# EAGLE board OpenBook_board (EAGLE 9.7.0)
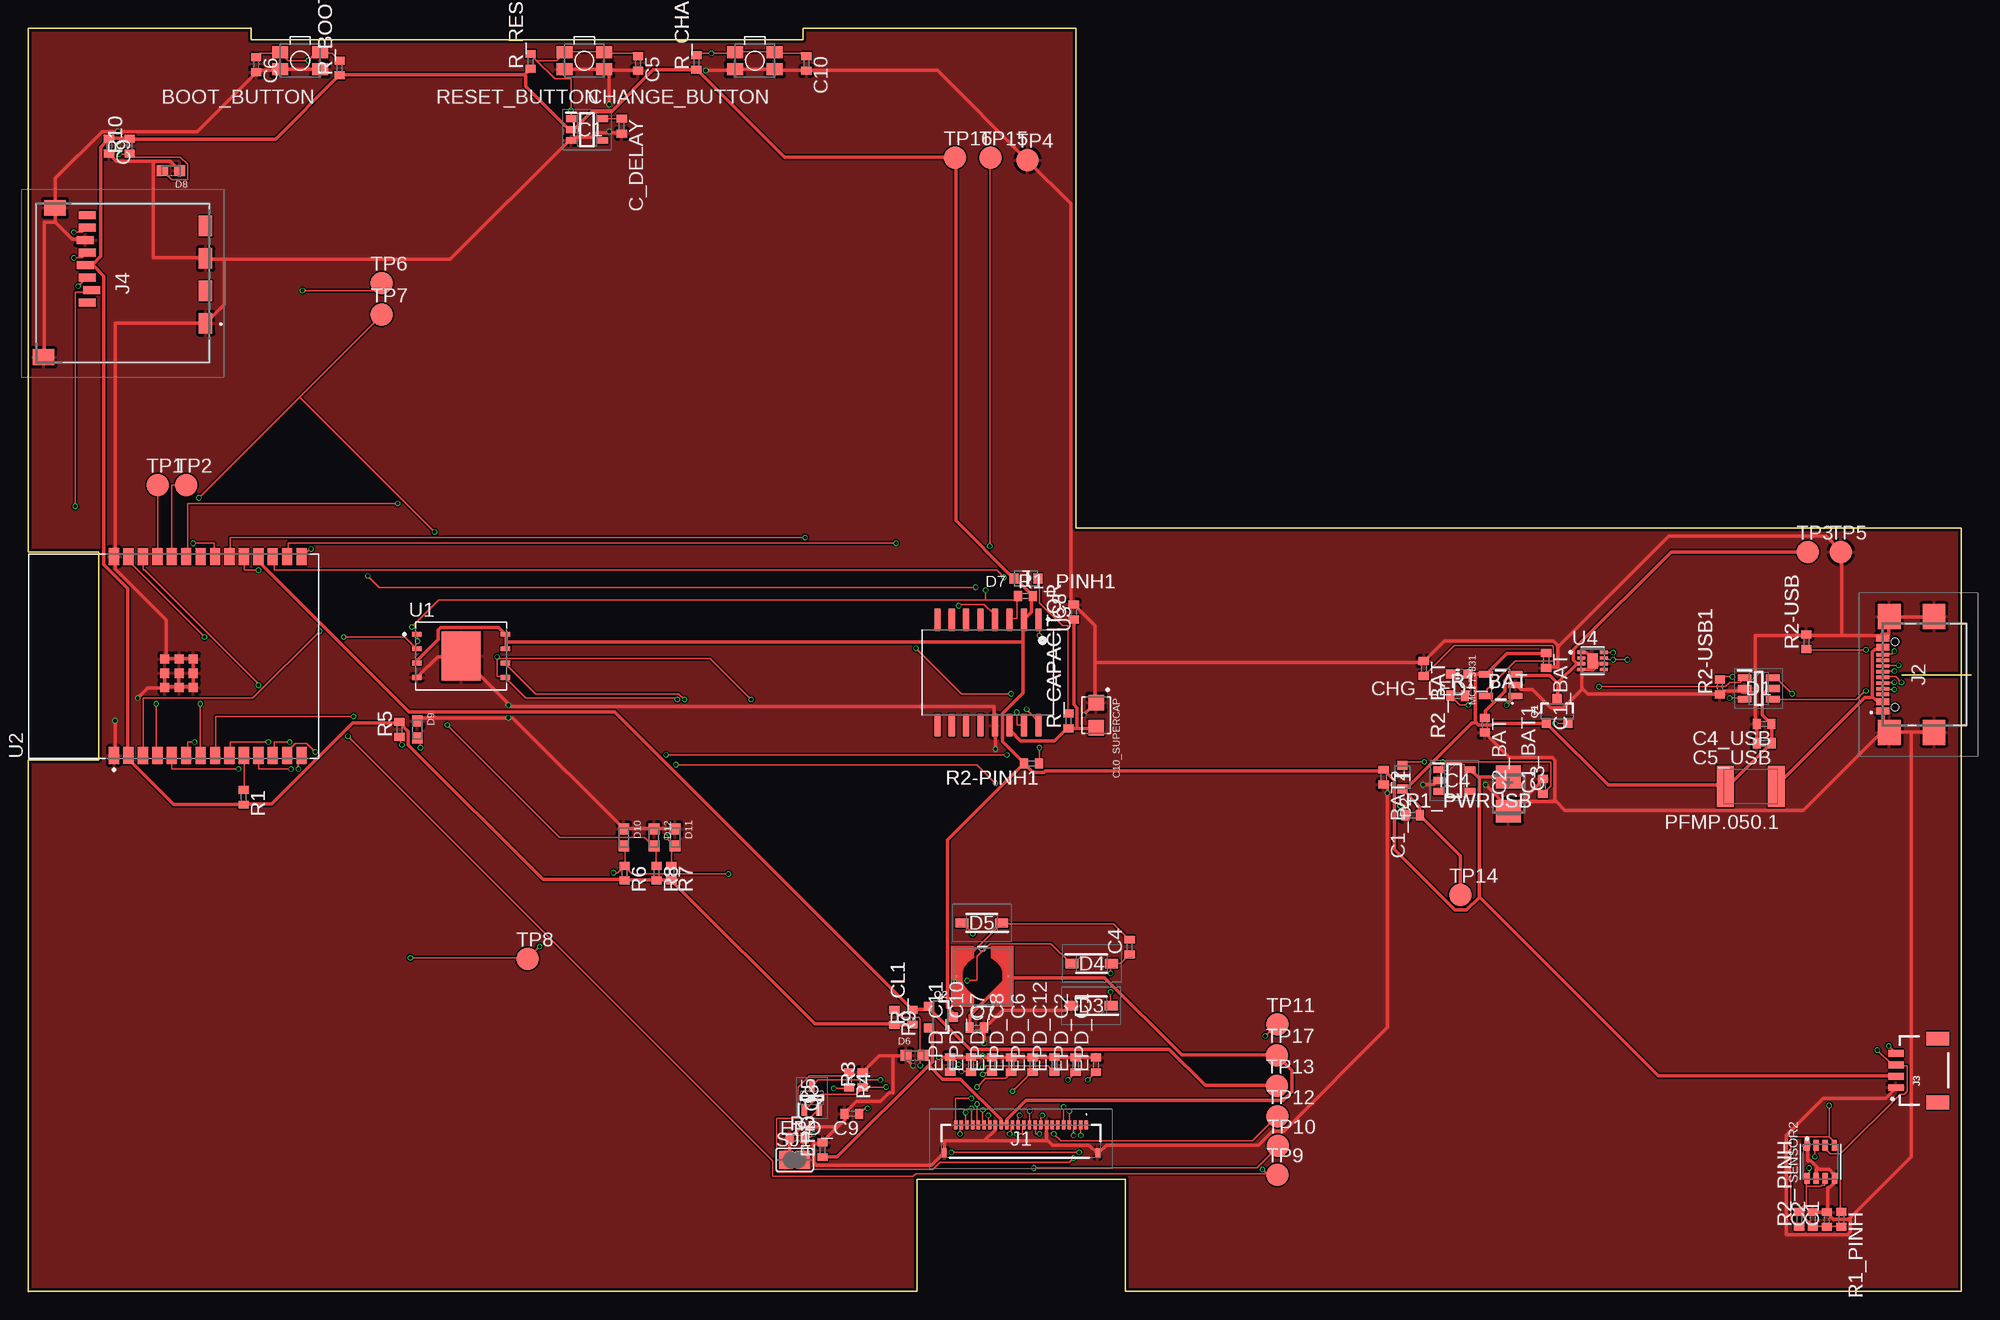
[diagram p0: board, top side]
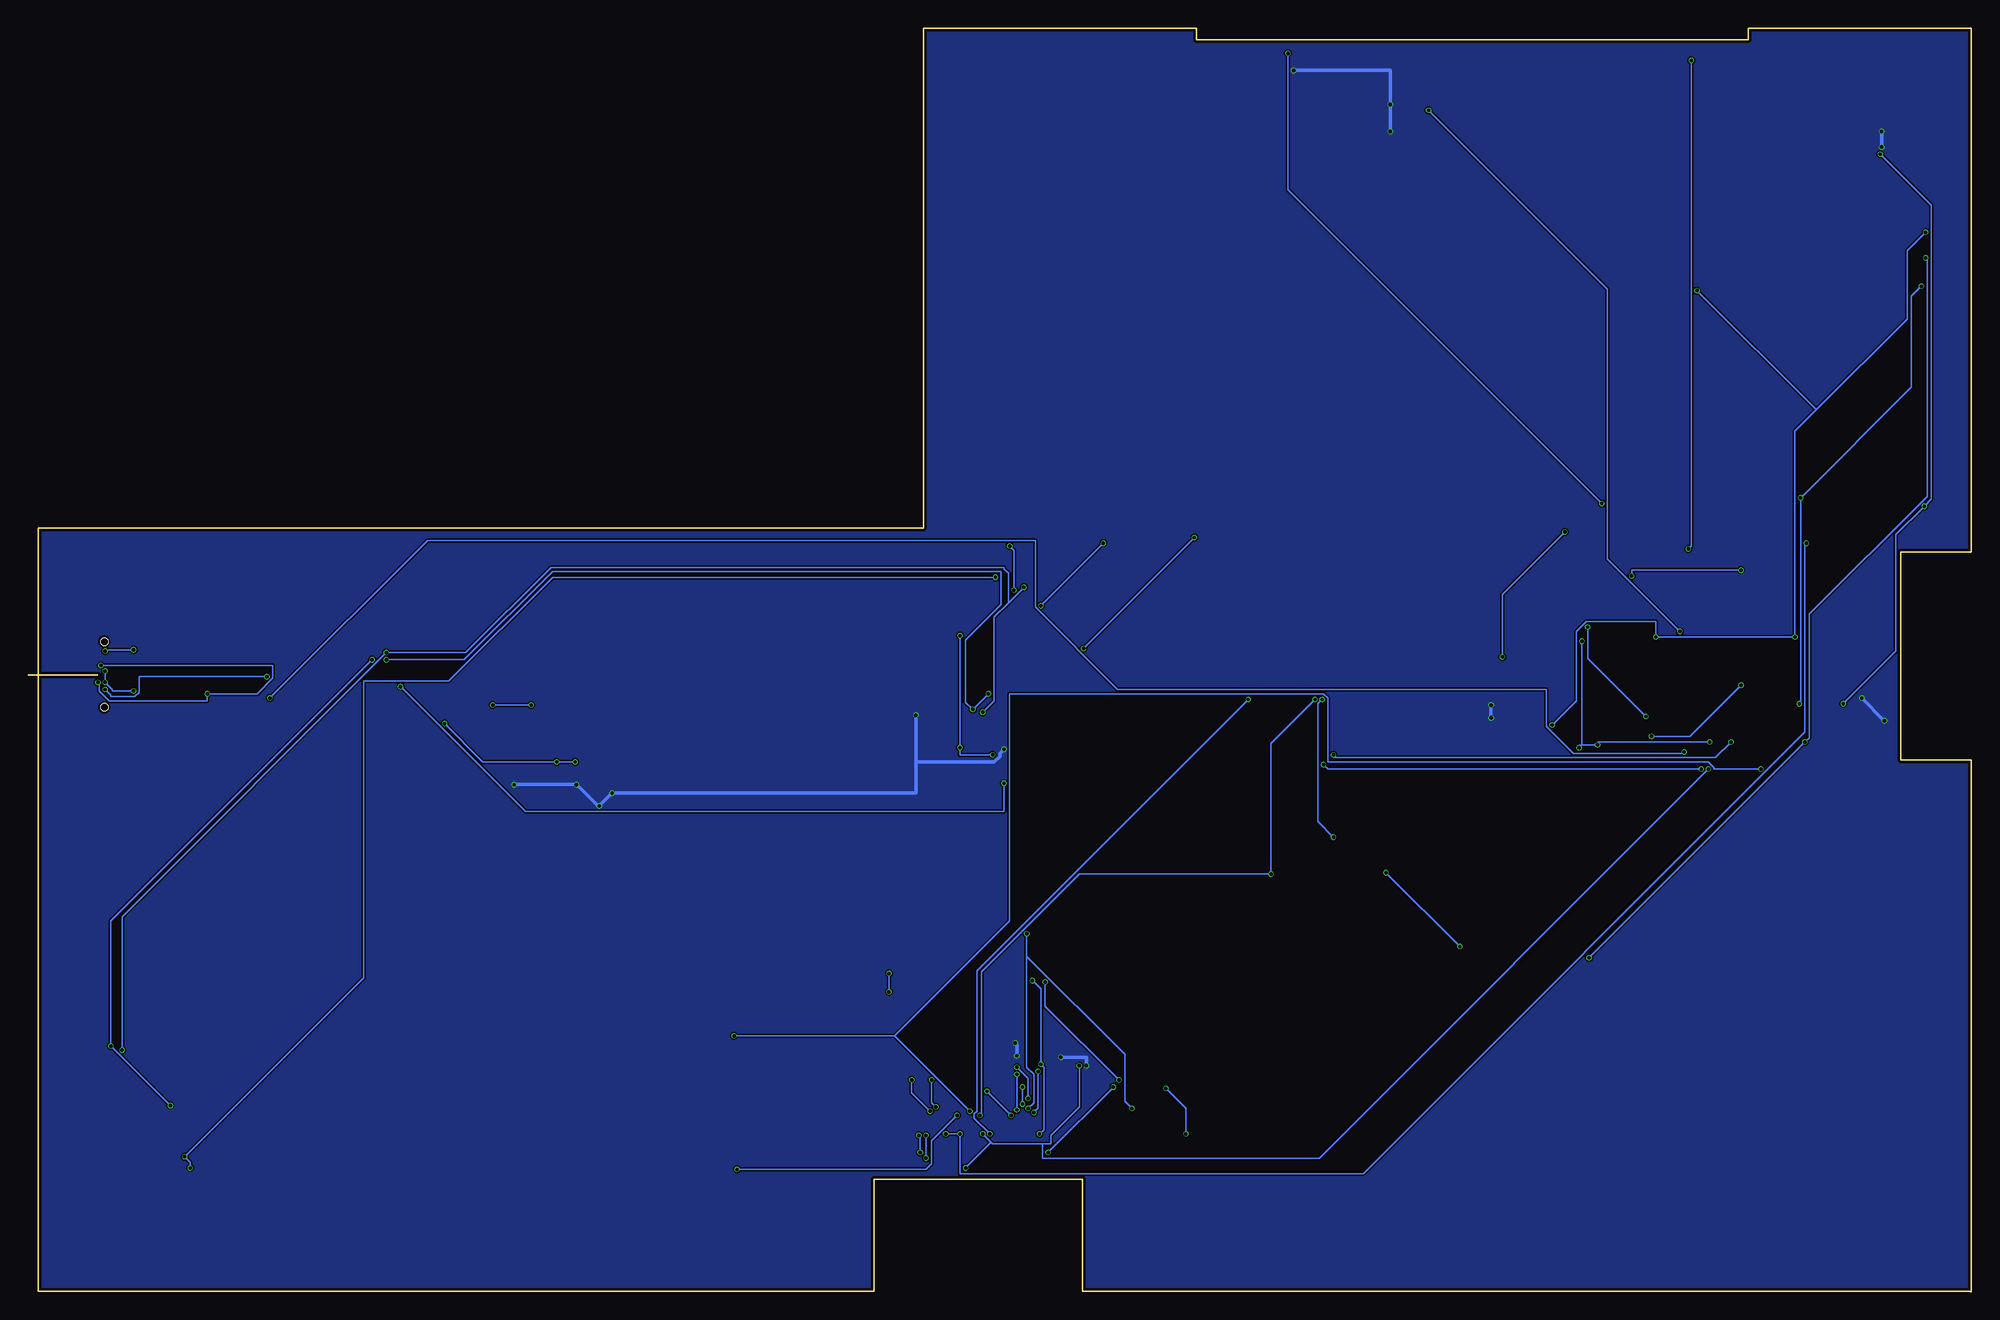
[diagram p1: board, bottom side, seen from below]

Size 171 x 111.2 mm. Coordinates in mm from the lower left corner, seen from the top.
Outline: 171,54.3 164.9,54.3
Outline: 0,0 0,46.8 6.2,46.8 6.2,65.1 0,65.1 0,111.2 19.6,111.2 19.6,110.2 68.2,110.2 68.2,111.2 92.2,111.2 92.2,67.2 170.15,67.2 170.15,0.08 170.12,0.04 96.57,0.04 96.57,9.9 78.2,9.9 78.2,0.04 0.04,0.04 0,0
Copper layers (1*16): Top 0.035mm / dielectric 1.6mm / Bottom 0.035mm
Design rules "jlcpcb-2layers *": minimum track width 5mil, minimum drill 0.3mm, track to track 5mil, track to pad 5mil, pad to pad 5mil, via to via 5mil, smd to smd 5mil, copper to edge 0.2mm, drill to drill 6mil, minimum pad ring 10mil, minimum via ring 3mil, stop-mask expansion 4mil, vias tented up to drill 0mil, thermal gap 10mil
Net classes: 0 default: width 0.15 mm; 1 Trasee Alimentare: width 0.3 mm

## Footprints (pad centres in the part's own frame; a part is rotated, then mirrored left to right if it is on the bottom)
MYBUTTON = smd 1.4 x 1.05: 1 1.75,0.75; 2 -1.75,0.75; 3 -1.75,-0.75; 4 1.75,-0.75
EAGLE-LTSPICE_C0402 = smd 0.7 x 0.9: 1 -0.65,0; 2 0.65,0
RCL_CT3528 = smd 2 x 2.2: + -1.5,0; - 1.5,0
CAPCP3225X100N = smd 1.4 x 1.4: 1 -1.1,0; 2 1.1,0
ADAFRUIT_CHIP-LED0603 = smd 0.8 x 0.8: A 0,-0.75; C 0,0.75
SOT95P280X145-6N = smd 1.2 x 0.6: 1 -1.25,0.95; 2 -1.25,0; 3 -1.25,-0.95; 4 1.25,-0.95; 5 1.25,0; 6 1.25,0.95
ESP32_WROVER_AVX---SD0805S020S1R0_AVX_SD0805S020S1R0_0 = smd 0.8 x 0.9: 1 -1.05,0; 2 1.05,0
SOD3716X135N = smd 1.15 x 0.8: 1 -1.75,0; 2 1.75,0
DIOC1608X36N = smd 0.97 x 0.94: 1 -0.75,0; 2 0.75,0
SOT95P280X125-5N = smd 0.9 x 0.6: 1 -1.4,0.95; 2 -1.4,0; 3 -1.4,-0.95; 4 1.4,-0.95; 5 1.4,0.95
SOT95P280X120-5N = smd 0.9 x 0.6: 1 -1.4,0.95; 2 -1.4,0; 3 -1.4,-0.95; 4 1.4,-0.95; 5 1.4,0.95
FH34SRJ24S05SH99 = smd 0.3 x 0.8: 1 5.75,1.45; 2 5.25,1.45; 3 4.75,1.45; 4 4.25,1.45; 5 3.75,1.45; 6 3.25,1.45; 7 2.75,1.45; 8 2.25,1.45; 9 1.75,1.45; 10 1.25,1.45; 11 0.75,1.45; 12 0.25,1.45; 13 -0.25,1.45; 14 -0.75,1.45; 15 -1.25,1.45; 16 -1.75,1.45; 17 -2.25,1.45; 18 -2.75,1.45; 19 -3.25,1.45; 20 -3.75,1.45; 21 -4.25,1.45; 22 -4.75,1.45; 23 -5.25,1.45; 24 -5.75,1.45 | smd 0.4 x 0.8: MP1 6.75,-1.05; MP2 -6.75,-1.05
SAMACSYS_PARTS_USB4110GFA = smd 0.3 x 1.15: A1 -3.35,3.678; A4 -2.55,3.678; A5 -1.25,3.678; A6 -0.25,3.678; A7 0.25,3.678; A8 1.25,3.678; A9 2.55,3.678; A12 3.35,3.678; B1 3.05,3.678; B4 2.25,3.678; B5 1.75,3.678; B6 0.75,3.678; B7 -0.75,3.678; B8 -1.75,3.678; B9 -2.25,3.678; B12 -3.05,3.678 | smd 2.18 x 2: MP1 -5.11,-0.827; MP2 5.11,-0.827; MP3 -5.11,3.103; MP4 5.11,3.103 | hole 0.65: -2.89,2.603; 2.89,2.603
JST04_1MM_RA = smd 0.6 x 1.35: 1 -1.5,0; 2 -0.5,0; 3 0.5,0; 4 1.5,0 | smd 1.2 x 2: NC1 2.8,-3.675; NC2 -2.8,-3.675
112ATAARR03ATTEND = smd 1.8 x 1.2: G1 10.6,10.4; G2 4.9,10.4; S1 7.75,10.4; S2 2.05,10.4 | smd 1.4 x 1.9: G3 13.6,-3.85; G4 0.45,-2.85 | smd 0.7 x 1.5: P1 8.8,0; P2 7.7,0.4; P3 6.6,0; P4 5.5,-0.2; P5 4.4,0; P6 3.3,-0.2; P7 2.2,0; P8 1.1,0
IND_4828-WE-TPC_WRE = smd 0.127 x 0.127: 1 -2.286,0; 2 2.286,0
ESP32_WROVER_SPARKFUN-IC-POWER_SOT23-5 = smd 0.55 x 1.2: 1 -0.95,-1.3; 2 0,-1.3; 3 0.95,-1.3; 4 0.95,1.3; 5 -0.95,1.3
ESP32C6_VARISTOR_CT/CN1812 = smd 1.5 x 3.6: 1 -2.25,0; 2 2.25,0
ESP32_WROVER_SPARKFUN-DISCRETESEMI_SOT23-3 = smd 0.8 x 0.9: 1 -0.95,-1; 2 0.95,-1; 3 0,1.1
SOT65P210X110-3N = smd 1.05 x 0.5: 1 -1.05,0.65; 2 -1.05,-0.65; 3 1.05,0
ESP32_WROVER_EAGLE-LTSPICE_R0402 = smd 0.7 x 0.9: 1 -0.65,0; 2 0.65,0
ESP32_WROVER_BME680_PSON80P300X300X100-8N = smd 1.016 x 0.5: 1 1.458,1.2; 2 1.458,0.4; 3 1.458,-0.4; 4 1.458,-1.2; 5 -1.458,-1.22; 6 -1.458,-0.4; 7 -1.458,0.4; 8 -1.458,1.2
SJ = smd 1.168 x 1.6: 1 -0.762,0; 2 0.762,0
TP20R = smd 2 x 2: TP 0,0
SON127P600X800X80-9N = smd 0.94 x 0.44: 1 -3.895,1.905; 2 -3.895,0.635; 3 -3.895,-0.635; 4 -3.895,-1.905; 5 3.895,-1.905; 6 3.895,-0.635; 7 3.895,0.635; 8 3.895,1.905 | smd 3.4 x 4.3: 9 0,0
XCVR_ESP32-C6-WROOM-1-N8 = smd 1.5 x 0.9: 1 -8.75,5.26; 2 -8.75,3.99; 3 -8.75,2.72; 4 -8.75,1.45; 5 -8.75,0.18; 6 -8.75,-1.09; 7 -8.75,-2.36; 8 -8.75,-3.63; 9 -8.75,-4.9; 10 -8.75,-6.17; 11 -8.75,-7.44; 12 -8.75,-8.71; 13 -8.75,-9.98; 14 -8.75,-11.25; 15 8.75,-11.25; 16 8.75,-9.98; 17 8.75,-8.71; 18 8.75,-7.44; 19 8.75,-6.17; 20 8.75,-4.9; 21 8.75,-3.63; 22 8.75,-2.36; 23 8.75,-1.09; 24 8.75,0.18; 25 8.75,1.45; 26 8.75,2.72; 27 8.75,3.99; 28 8.75,5.26 | smd 0.8 x 0.8: 29_1 -2.755,0.79; 29_2 -1.505,0.79; 29_3 -0.255,0.79; 29_4 -2.755,-0.46; 29_5 -1.505,-0.46; 29_6 -0.255,-0.46; 29_7 -2.755,-1.71; 29_8 -1.505,-1.71; 29_9 -0.255,-1.71
SOIC127P1032X265-16N = smd 2.05 x 0.59: 1 -4.655,4.445; 2 -4.655,3.175; 3 -4.655,1.905; 4 -4.655,0.635; 5 -4.655,-0.635; 6 -4.655,-1.905; 7 -4.655,-3.175; 8 -4.655,-4.445; 9 4.655,-4.445; 10 4.655,-3.175; 11 4.655,-1.905; 12 4.655,-0.635; 13 4.655,0.635; 14 4.655,1.905; 15 4.655,3.175; 16 4.655,4.445
SON50P200X200X80-9N = smd 0.76 x 0.27: 1 -0.985,0.75; 2 -0.985,0.25; 3 -0.985,-0.25; 4 -0.985,-0.75; 5 0.985,-0.75; 6 0.985,-0.25; 7 0.985,0.25; 8 0.985,0.75 | smd 0.9 x 1.3: 9 0,0

## Placement (x,y rotation side)
BOOT_BUTTON  BUTTON_CUSYOMV1  [MYBUTTON]  23.92,108.35 180 top
C1  100nF  [EAGLE-LTSPICE_C0402]  158.29,6.35 90 top
C1_BAT  4.7uF  [EAGLE-LTSPICE_C0402]  133.59,55.55 270 top
C1_BAT1  4.7uF  [EAGLE-LTSPICE_C0402]  133.31,44.47 90 top
C1_BAT2  4.7uF  [EAGLE-LTSPICE_C0402]  119.29,45.29 270 top
C2  100nF  [EAGLE-LTSPICE_C0402]  157.07,6.35 90 top
C2_BAT  4.7uF  [EAGLE-LTSPICE_C0402]  128.2,49.85 270 top
C3  100uF  [RCL_CT3528]  130.29,43.8 270 top
C4  4.7uF  [EAGLE-LTSPICE_C0402]  96.93,30.33 90 top
C4_USB  100nF  [EAGLE-LTSPICE_C0402]  152.78,49.97 180 top
C5  1uF  [EAGLE-LTSPICE_C0402]  53.66,108.11 270 top
C5_USB  4.7uF  [EAGLE-LTSPICE_C0402]  152.79,48.27 180 top
C6  100nF  [EAGLE-LTSPICE_C0402]  20.05,108.01 270 top
C7  10uF  [EAGLE-LTSPICE_C0402]  83.48,23.23 0 top
C8  100nF  [EAGLE-LTSPICE_C0402]  92.02,59.83 90 top
C9  100nF  [EAGLE-LTSPICE_C0402]  7.1,100.83 270 top
C10  100nF  [EAGLE-LTSPICE_C0402]  68.48,108.11 270 top
C10_SUPERCAP  CPH3225A  [CAPCP3225X100N]  93.99,50.74 270 top
C_DELAY  100nF  [EAGLE-LTSPICE_C0402]  52.23,102.59 270 top
CHANGE_BUTTON  BUTTON_CUSYOMV1  [MYBUTTON]  63.94,108.35 180 top
CHG_LED  [ADAFRUIT_CHIP-LED0603]  125.94,54.35 90 top
D1  USBLC6-2SC6Y  [SOT95P280X145-6N]  152.3,53.09 0 top
D2  ESP32_WROVER_AVX---SD0805S020S1R0_AVX_SD0805S020S1R0_0_0AVX_SD0805S020S1R0_0_0  [ESP32_WROVER_AVX---SD0805S020S1R0_AVX_SD0805S020S1R0_0]  120.95,45.28 270 top
D3  MBR0530  [SOD3716X135N]  93.56,25.17 180 top
D4  MBR0530  [SOD3716X135N]  93.6,28.87 0 top
D5  MBR0530  [SOD3716X135N]  83.92,32.45 180 top
D6  PGB1010603MR  [DIOC1608X36N]  78,20.79 0 top
D7  ESP32_WROVER_AVX---SD0805S020S1R0_AVX_SD0805S020S1R0_0_0AVX_SD0805S020S1R0_0_0  [ESP32_WROVER_AVX---SD0805S020S1R0_AVX_SD0805S020S1R0_0]  87.8,62.78 180 top
D8  PGB1010603MR  [DIOC1608X36N]  12.55,98.67 180 top
D9  PGB1010603MR  [DIOC1608X36N]  34.23,49.47 270 top
D10  PGB1010603MR  [DIOC1608X36N]  52.41,39.97 270 top
D11  PGB1010603MR  [DIOC1608X36N]  56.93,39.97 270 top
D12  PGB1010603MR  [DIOC1608X36N]  55.07,39.97 270 top
EPD_C1  1uF/50V  [EAGLE-LTSPICE_C0402]  93.98,19.97 90 top
EPD_C2  1uF/50V  [EAGLE-LTSPICE_C0402]  92.19,19.97 90 top
EPD_C5  0.1uF/50V  [EAGLE-LTSPICE_C0402]  69.91,12.49 90 top
EPD_C6  1uF/50V  [EAGLE-LTSPICE_C0402]  88.4,19.97 90 top
EPD_C7  1uF/50V  [EAGLE-LTSPICE_C0402]  84.81,19.97 90 top
EPD_C8  1uF/50V  [EAGLE-LTSPICE_C0402]  86.52,19.97 90 top
EPD_C9  1uF/50V  [EAGLE-LTSPICE_C0402]  72.48,15.65 180 top
EPD_C10  1uF/50V  [EAGLE-LTSPICE_C0402]  82.97,19.99 90 top
EPD_C11  1uF/50V  [EAGLE-LTSPICE_C0402]  81.15,19.99 90 top
EPD_C12  1uF/50V  [EAGLE-LTSPICE_C0402]  90.31,19.99 90 top
IC1  BD5229G-TR  [SOT95P280X125-5N]  49.17,102.29 0 top
IC4  XC6220A331MR-G  [SOT95P280X120-5N]  125.51,44.99 0 top
J1  FH34SRJ-24S-0.5SH_99_  [FH34SRJ24S05SH99]  87.37,13.24 0 top
J2  SAMACSYS_PARTS_USB4110-GF-A  [SAMACSYS_PARTS_USB4110GFA]  166.91,54.32 90 top
J3  QWIIC_RIGHT_ANGLE  [JST04_1MM_RA]  164.39,19.46 90 top
J4  112A-TAAR-R03_ATTEND  [112ATAARR03ATTEND]  5.19,95.85 270 top
L1  68uH  [IND_4828-WE-TPC_WRE]  83.97,27.75 0 top
MCP73831  ESP32_WROVER_SPARKFUN-IC-POWER_MCP73831  [ESP32_WROVER_SPARKFUN-IC-POWER_SOT23-5]  129.59,53.39 90 top
PFMP.050.1  ESP32C6_VARISTORCN1812  [ESP32C6_VARISTOR_CT/CN1812]  151.6,44.46 180 top
Q1  20V/4.2A/52mΩ/1.4W  [ESP32_WROVER_SPARKFUN-DISCRETESEMI_SOT23-3]  134.56,51.06 0 top
Q2  20V/4.2A/52mΩ/1.4W  [ESP32_WROVER_SPARKFUN-DISCRETESEMI_SOT23-3]  80.28,24.16 270 top
Q3  SI1308EDL-T1-GE3  [SOT65P210X110-3N]  68.95,17.05 90 top
R1  10K  [ESP32_WROVER_EAGLE-LTSPICE_R0402]  18.95,43.51 270 top
R1_BAT  200  [ESP32_WROVER_EAGLE-LTSPICE_R0402]  125.81,52.45 0 top
R1_PINH  10K  [ESP32_WROVER_EAGLE-LTSPICE_R0402]  159.58,6.37 270 top
R1_PINH1  10K  [ESP32_WROVER_EAGLE-LTSPICE_R0402]  87.76,61.24 0 top
R1_PWRUSB  100K  [ESP32_WROVER_EAGLE-LTSPICE_R0402]  121.85,41.94 0 top
R2  2.2  [ESP32_WROVER_EAGLE-LTSPICE_R0402]  67.66,13.51 0 top
R2-PINH1  10K  [ESP32_WROVER_EAGLE-LTSPICE_R0402]  88.29,46.49 180 top
R2-USB  5k1  [ESP32_WROVER_EAGLE-LTSPICE_R0402]  156.49,57.21 90 top
R2-USB1  5K1  [ESP32_WROVER_EAGLE-LTSPICE_R0402]  148.88,53.23 90 top
R2_BAT  2K  [ESP32_WROVER_EAGLE-LTSPICE_R0402]  122.82,54.85 270 top
R2_PINH  10K  [ESP32_WROVER_EAGLE-LTSPICE_R0402]  155.86,6.37 90 top
R3  10K  [ESP32_WROVER_EAGLE-LTSPICE_R0402]  73.44,18.63 90 top
R4  0.47  [ESP32_WROVER_EAGLE-LTSPICE_R0402]  72.24,18.63 270 top
R5  10K  [ESP32_WROVER_EAGLE-LTSPICE_R0402]  32.66,49.48 90 top
R6  10K  [ESP32_WROVER_EAGLE-LTSPICE_R0402]  52.48,36.83 270 top
R7  10K  [ESP32_WROVER_EAGLE-LTSPICE_R0402]  56.6,36.83 270 top
R8  10K  [ESP32_WROVER_EAGLE-LTSPICE_R0402]  55.3,36.83 270 top
R9  10K  [ESP32_WROVER_EAGLE-LTSPICE_R0402]  76.21,24.13 270 top
R10  10K  [ESP32_WROVER_EAGLE-LTSPICE_R0402]  8.92,100.83 90 top
R_BOOT  10k  [ESP32_WROVER_EAGLE-LTSPICE_R0402]  27.4,107.72 90 top
R_CAPACITOR  15  [ESP32_WROVER_EAGLE-LTSPICE_R0402]  91.55,50.24 90 top
R_CHANGE  10k  [ESP32_WROVER_EAGLE-LTSPICE_R0402]  58.8,108.2 90 top
R_CL1  10K  [ESP32_WROVER_EAGLE-LTSPICE_R0402]  77.81,24.15 90 top
R_RESET  10k  [ESP32_WROVER_EAGLE-LTSPICE_R0402]  44.2,108.3 90 top
RESET_BUTTON  BUTTON_CUSYOMV1  [MYBUTTON]  48.93,108.35 180 top
SENSOR2  ESP32_WROVER_BME680_BME680  [ESP32_WROVER_BME680_PSON80P300X300X100-8N]  157.75,11.42 90 top
SJ1  [SJ]  67.44,11.59 0 top
TP1  TPTP20R  [TP20R]  11.37,71.01 0 top
TP2  TPTP20R  [TP20R]  13.89,71.01 0 top
TP3  TPTP20R  [TP20R]  156.61,65.11 0 top
TP4  TPTP20R  [TP20R]  87.93,99.61 0 top
TP5  TPTP20R  [TP20R]  159.55,65.11 0 top
TP6  TPTP20R  [TP20R]  31.09,88.79 0 top
TP7  TPTP20R  [TP20R]  31.11,85.99 0 top
TP8  TPTP20R  [TP20R]  43.93,29.29 0 top
TP9  TPTP20R  [TP20R]  109.95,10.29 0 top
TP10  TPTP20R  [TP20R]  110,12.81 0 top
TP11  TPTP20R  [TP20R]  109.95,23.51 0 top
TP12  TPTP20R  [TP20R]  109.95,15.41 0 top
TP13  TPTP20R  [TP20R]  109.9,18.11 0 top
TP14  TPTP20R  [TP20R]  126.05,34.91 0 top
TP15  TPTP20R  [TP20R]  84.7,99.81 0 top
TP16  TPTP20R  [TP20R]  81.55,99.81 0 top
TP17  TPTP20R  [TP20R]  109.9,20.81 0 top
U1  W25Q512JVEIQ  [SON127P600X800X80-9N]  38.09,55.96 0 top
U2  ESP32-C6-WROOM-1-N8  [XCVR_ESP32-C6-WROOM-1-N8]  12.8,55.94 90 top
U3  DS3231SN#  [SOIC127P1032X265-16N]  84.45,54.5 270 top
U4  MAX17048G+T10  [SON50P200X200X80-9N]  137.68,55.52 0 top

## Library data of the parts
BOOT_BUTTON C1 C1_BAT C1_BAT1 C1_BAT2 C2 C2_BAT C4 C4_USB C5 C5_USB C6-C10 C_DELAY CHANGE_BUTTON CHG_LED D3-D6 D8-D12 EPD_C1 EPD_C2 EPD_C5-EPD_C12 PFMP.050.1 R1 R1_BAT R1_PINH R1_PINH1 R1_PWRUSB R2 R2-PINH1 R2-USB R2-USB1 R2_BAT R2_PINH R3-R10 R_BOOT R_CAPACITOR R_CHANGE R_CL1 R_RESET RESET_BUTTON SJ1 TP1-TP17 = DeskAssistant v19 v1
C3 = DeskAssistant v19 v1; SPICEPREFIX: C
C10_SUPERCAP = DeskAssistant v19 v1; AVAILABILITY: Not in stock; CHECK_PRICES: https://www.snapeda.com/parts/CPH3225A/Seiko+Instruments/view-part/?ref=eda; DESCRIPTION: 11 mF (EDLC) Supercapacitor 3.3 V 1210 (3225 Metric) - -; MF: Seiko Instruments; MP: CPH3225A; PACKAGE: 1210 Seiko; PRICE: None; PURCHASE-URL: https://www.snapeda.com/api/url_track_click_mouser/?unipart_id=562593&manufacturer=Seiko Instruments&part_name=CPH3225A&search_term=None; SNAPEDA_LINK: https://www.snapeda.com/parts/CPH3225A/Seiko+Instruments/view-part/?ref=snap
D1 = DeskAssistant v19 v1; AVAILABILITY: In Stock; CHECK_PRICES: https://www.snapeda.com/parts/USBLC6-2SC6Y/STMicroelectronics/view-part/?ref=eda; DESCRIPTION: 17V Clamp 5A (8/20µs) Ipp Tvs Diode Surface Mount SOT-23-6; MF: STMicroelectronics; MP: USBLC6-2SC6Y; PACKAGE: SOT-23-6 STMicroelectronics; PRICE: None; SNAPEDA_LINK: https://www.snapeda.com/parts/USBLC6-2SC6Y/STMicroelectronics/view-part/?ref=snap
D2 D7 = DeskAssistant v19 v1; CENTROID_NOT_SPECIFIED: No; DATASHEET: http://datasheets.avx.com/schottky.pdf; DIGIKEY_DESCRIPTION: DIODE SCHOTTKY 20V 1A 0805; DIGIKEY_PART_NUMBER: 478-7800-1-ND; LEAD_FREE: yes; MF: AVX; MOUSER_PART_NUMBER: 581-SD0805S020S1R0; PACKAGE: 0805 (2012 metric); PREFIX: D; ROHS: yes; TEMPERATURE_RANGE_HIGH: +125°C; TEMPERATURE_RANGE_LOW: -55°C
IC1 = DeskAssistant v19 v1; DESCRIPTION: Voltage Detector with Adjustable Delay Time: CMOS processes are utilized to develop high precision, low current consumption CMOS reset ICs that allow arbitrary setting of the delay time. The extensive lineup includes both Nch Open Drain and CMOS output types in a wide range of detection voltages (from 2.3V to 6.0V, in 0.1V steps), enabling selection of the ideal solution based on customer requirements. In addition, the entire series is of course both lead-free and RoHS-compliant.; HEIGHT: 1.25mm; MANUFACTURER_NAME: ROHM Semiconductor; MANUFACTURER_PART_NUMBER: BD5229G-TR; MOUSER_PART_NUMBER: 755-BD5229G-TR; MOUSER_PRICE-STOCK: https://www.mouser.co.uk/ProductDetail/ROHM-Semiconductor/BD5229G-TR?qs=4kLU8WoGk0vvnhrrYwdszw%3D%3D
IC4 = DeskAssistant v19 v1; DESCRIPTION: LDO Voltage Regulators; HEIGHT: 1.2mm; MANUFACTURER_NAME: Torex; MANUFACTURER_PART_NUMBER: XC6220A331MR-G; MOUSER_PART_NUMBER: 865-XC6220A331MR-G; MOUSER_PRICE-STOCK: https://www.mouser.co.uk/ProductDetail/Torex-Semiconductor/XC6220A331MR-G?qs=AsjdqWjXhJ8ZSWznL1J0gg%3D%3D
J1 = DeskAssistant v19 v1; DESCRIPTION: 24 Position FFC, FPC Connector Contacts, Top and Bottom 0.020" (0.50mm) Surface Mount, Right Angle; HEIGHT: 1.1mm; MANUFACTURER_NAME: Hirose; MANUFACTURER_PART_NUMBER: FH34SRJ-24S-0.5SH(99); MOUSER_PART_NUMBER: 798-FH34SRJ24S05SH99; MOUSER_PRICE-STOCK: https://www.mouser.co.uk/ProductDetail/Hirose-Connector/FH34SRJ-24S-0.5SH99?qs=vcbW%252B4%252BSTIpKBl5ap9J8Fw%3D%3D
J2 = DeskAssistant v19 v1; DESCRIPTION: CONN USB 2.0 TYPE-C R/A SMT; HEIGHT: 3.26mm; MANUFACTURER_NAME: GCT (GLOBAL CONNECTOR TECHNOLOGY); MANUFACTURER_PART_NUMBER: USB4110-GF-A; MOUSER_PART_NUMBER: 640-USB4110-GF-A; MOUSER_PRICE-STOCK: https://www.mouser.co.uk/ProductDetail/GCT/USB4110-GF-A?qs=KUoIvG%2F9IlYiZvIXQjyJeA%3D%3D
J3 = DeskAssistant v19 v1; PROD_ID: CONN-13694
J4 = DeskAssistant v19 v1; DESCRIPTION: Micro SD Card Socket, Push-Push Type, Top Mount, SMT, H=1.83mm, 10u; HEIGHT: 1.9mm; MANUFACTURER_NAME: ATTEND; MANUFACTURER_PART_NUMBER: 112A-TAAR-R03 ATTEND
L1 = DeskAssistant v19 v1; COPYRIGHT: Copyright (C) 2024 Ultra Librarian. All rights reserved.; MANUFACTURER_PART_NUMBER: 744043680; MFR_NAME: Wurth Electronics
MCP73831 = DeskAssistant v19 v1; PROD_ID: IC-09995
Q1 Q2 = DeskAssistant v19 v1; PROD_ID: TRAN-14388
Q3 = DeskAssistant v19 v1; AVAILABILITY: In Stock; CHECK_PRICES: https://www.snapeda.com/parts/SI1308EDL-T1-GE3/Vishay+Siliconix/view-part/?ref=eda; DESCRIPTION: Si1308EDL-T1-GE3 N-channel MOSFET Transistor, 1.5 A, 30 V, 3-Pin SC-70 | Siliconix / Vishay SI1308EDL-T1-GE3; MF: Vishay Siliconix; MP: SI1308EDL-T1-GE3; PACKAGE: SOT-323 Vishay Semiconductor; PRICE: None; PURCHASE-URL: https://www.snapeda.com/api/url_track_click_mouser/?unipart_id=274603&manufacturer=Vishay Siliconix&part_name=SI1308EDL-T1-GE3&search_term=None; SNAPEDA_LINK: https://www.snapeda.com/parts/SI1308EDL-T1-GE3/Vishay+Siliconix/view-part/?ref=snap
SENSOR2 = DeskAssistant v19 v1; AVAILABILITY: Unavailable; DESCRIPTION: Integrated Environmental Unit; MF: Bosch Sensortec; MP: BME680; PACKAGE: LGA-8 Bosch Tools; PRICE: None
U1 = DeskAssistant v19 v1; AVAILABILITY: In Stock; CHECK_PRICES: https://www.snapeda.com/parts/W25Q512JVEIQ/Winbond+Electronics/view-part/?ref=eda; DESCRIPTION: FLASH - NOR Memory IC 512Mb (64M x 8) SPI - Quad I/O 133 MHz 8-WSON (8x6); MF: Winbond Electronics; MP: W25Q512JVEIQ; PACKAGE: Package; PRICE: None; SNAPEDA_LINK: https://www.snapeda.com/parts/W25Q512JVEIQ/Winbond+Electronics/view-part/?ref=snap
U2 = DeskAssistant v19 v1; AVAILABILITY: In Stock; CHECK_PRICES: https://www.snapeda.com/parts/ESP32-C6-WROOM-1-N8/Espressif+Systems/view-part/?ref=eda; DESCRIPTION: Multiprotocol Modules ESP32-C6 module, Wi-Fi 6 in 2.4 GHz band, Bluetooth 5, Zigbee 3.0 and Thread. ESP34-WROOM Compatible - ENGINEERING SAMPLE; MF: Espressif Systems; MP: ESP32-C6-WROOM-1-N8; PACKAGE: None; PRICE: None; SNAPEDA_LINK: https://www.snapeda.com/parts/ESP32-C6-WROOM-1-N8/Espressif+Systems/view-part/?ref=snap
U3 = DeskAssistant v19 v1; AVAILABILITY: In Stock; CHECK_PRICES: https://www.snapeda.com/parts/DS3231SN%23/Analog+Devices/view-part/?ref=eda; DESCRIPTION: Extremely Accurate I²C-Integrated RTC/TCXO/Crystal; MF: Analog Devices; MP: DS3231SN#; PACKAGE: SOIC-16 Maxim; PRICE: None; PURCHASE-URL: https://www.snapeda.com/api/url_track_click_mouser/?unipart_id=99048&manufacturer=Analog Devices&part_name=DS3231SN#&search_term=None; SNAPEDA_LINK: https://www.snapeda.com/parts/DS3231SN%23/Analog+Devices/view-part/?ref=snap
U4 = DeskAssistant v19 v1; AVAILABILITY: In Stock; CHECK_PRICES: https://www.snapeda.com/parts/MAX17048G+T10/Analog+Devices/view-part/?ref=eda; DESCRIPTION: 3µA 1-Cell/2-Cell Fuel Gauge with ModelGauge; MF: Analog Devices; MP: MAX17048G+T10; PACKAGE: TDFN-8 Maxim; PRICE: None; PURCHASE-URL: https://www.snapeda.com/api/url_track_click_mouser/?unipart_id=329239&manufacturer=Analog Devices&part_name=MAX17048G+T10&search_term=None; SNAPEDA_LINK: https://www.snapeda.com/parts/MAX17048G+T10/Analog+Devices/view-part/?ref=snap

## Nets
3V3 [Trasee Alimentare]: C1_BAT2.1 C3.+ C9.1 D7.2 IC1.2 IC4.5 J3.2 J4.P4 Q2.3 R1.2 R1_PINH1.2 R2-PINH1.2 R5.2 R6.2 R7.2 R8.2 R9.2 R10.2 R_BOOT.1 R_CHANGE.1 R_CL1.1 R_RESET.1 TP16.TP U1.3 U1.7 U1.8 U2.2 U3.2
32KHZ: R2-PINH1.1 U2.9 U3.1
DN: D1.4 J2.A7 J2.B7
DP: D1.6 J2.A6 J2.B6
EPD_3V3 [Trasee Alimentare]: C7.1 EPD_C5.1 J1.15 J1.16 L1.2 Q2.2 TP17.TP
EPD_3V3_C [Trasee Alimentare]: Q2.1 R_CL1.2 TP13.TP U2.18
EPD_BUSY: J1.9 TP9.TP U2.26
EPD_CS: D6.2 J1.12 R9.1 TP10.TP U2.11
EPD_DC: J1.11 TP11.TP U2.5
EPD_RST: J1.10 TP12.TP U2.21
FLASH_CS: D9.2 R5.1 U1.1 U2.12
GDR: J1.2 Q3.1 R3.1
GND [Trasee Alimentare]: BOOT_BUTTON.1 BOOT_BUTTON.2 C1.2 C1_BAT1.2 C1_BAT2.2 C1_BAT.2 C2.2 C2_BAT.2 C3.- C4_USB.2 C5.2 C5_USB.2 C6.2 C7.2 C8.2 C9.2 C10.2 C10_SUPERCAP.1 C_DELAY.2 CHANGE_BUTTON.1 CHANGE_BUTTON.2 D1.2 D3.2 D6.1 D8.1 D9.1 D10.1 D11.1 D12.1 EPD_C1.2 EPD_C2.2 EPD_C5.2 EPD_C6.2 EPD_C7.2 EPD_C8.2 EPD_C9.2 EPD_C10.2 EPD_C11.2 EPD_C12.2 IC1.3 IC4.2 J1.8 J1.17 J1.MP1 J1.MP2 J2.A1 J2.A12 J2.B1 J2.B12 J2.MP1 J2.MP2 J2.MP3 J2.MP4 J3.1 J4.G1 J4.G2 J4.G3 J4.G4 J4.P6 MCP73831.2 R1_PWRUSB.1 R2-USB1.1 R2-USB.2 R2.1 R2_BAT.1 R3.2 RESET_BUTTON.1 RESET_BUTTON.2 SENSOR2.1 SENSOR2.5 SENSOR2.7 SJ1.1 TP4.TP TP5.TP U1.4 U1.9 U2.1 U2.28 U2.29_1 U2.29_2 U2.29_3 U2.29_4 U2.29_5 U2.29_6 U2.29_7 U2.29_8 U2.29_9 U3.13 U4.1 U4.4 U4.6 U4.9
GPIO8: R1.1 U2.10
I2C_PW: C1.1 C2.1 R1_PINH.2 R2_PINH.2 SENSOR2.2 SENSOR2.6 SENSOR2.8 U2.17
INT_RTC: R1_PINH1.1 TP15.TP U2.8 U3.3
IO/BOOT: BOOT_BUTTON.3 BOOT_BUTTON.4 C6.1 R_BOOT.2 U2.15
IO/CHANGE: C10.1 CHANGE_BUTTON.3 CHANGE_BUTTON.4 R_CHANGE.2 U2.23
MISO: D12.2 J4.P7 R8.1 TP6.TP U1.2 U2.27
MOSI: D11.2 J1.14 J4.P3 R7.1 TP7.TP U1.5 U2.7
N$1: J2.B5 R2-USB.1
N$2: EPD_C12.1 J1.24
N$3: J2.A5 R2-USB1.2
N$4: C1_BAT1.1 D2.1 IC4.1 IC4.3 Q1.2
N$5: MCP73831.1 R1_BAT.1
N$6: CHG_LED.C R1_BAT.2
N$7: C4.1 D3.1 D4.2
N$8: EPD_C6.1 J1.18
N$9: MCP73831.5 R2_BAT.2
N$10: EPD_C1.1 J1.4
N$11: EPD_C2.1 J1.5
N$12: C_DELAY.1 IC1.5
N$13: EPD_C7.1 J1.19
N$14: EPD_C8.1 J1.20
N$15: EPD_C10.1 J1.22
N$16: D7.1 R_CAPACITOR.2
PREVGH: D5.2 EPD_C9.1 J1.21
PREVGL: D4.1 EPD_C11.1 J1.23
RESE: J1.3 Q3.2 R4.1
RESE': R2.2 R4.2 SJ1.2
RESET: C5.1 IC1.1 R_RESET.2 RESET_BUTTON.3 RESET_BUTTON.4 U2.3
RTC_RST: U2.16 U3.4
RX: TP2.TP U2.24
SCK: D10.2 J1.13 J4.P5 R6.1 TP8.TP U1.6 U2.6
SCL: J3.4 R2_PINH.1 SENSOR2.4 U2.20 U3.16 U4.7
SDA: J3.3 R1_PINH.1 SENSOR2.3 U2.19 U3.15 U4.8
SRC: C4.2 D5.1 L1.1 Q3.3
SS_SD: D8.2 J4.P2 R10.1 U2.4
TX: TP1.TP U2.25
USB_D+: D1.1 U2.14
USB_D-: D1.3 U2.13
VBAT [Trasee Alimentare]: C2_BAT.1 MCP73831.3 Q1.3 TP3.TP U4.2 U4.3
VBUS [Trasee Alimentare]: C1_BAT.1 C4_USB.1 C5_USB.1 CHG_LED.A D1.5 D2.2 MCP73831.4 PFMP.050.1.2 Q1.1 R1_PWRUSB.2 TP14.TP
VRTC [Trasee Alimentare]: C8.1 C10_SUPERCAP.2 R_CAPACITOR.1 U3.14
VUSB [Trasee Alimentare]: J2.A4 J2.A9 J2.B4 J2.B9 PFMP.050.1.1

## Tracks (layer width: path | path; a pad name or v marks a point on that pad's centre or on a via)
3V3
  Top 0.3: R_CL1.1 77.77,23.48 76.24,23.48 R9.2 76.11,23.55 69.25,23.55 56.72,36.08 R7.2 56.58,36.22 55.4,36.22 R8.2 55.26,36.22 52.49,36.22 R6.2 52.35,36.29 45.29,36.29 33.45,48.13 33.45,49.31 32.76,50 R5.2 32.62,50.07 28.53,50.07 21.4,42.94 19.04,42.94 R1.2 18.91,42.87 12.81,42.87 8.86,46.81 8.86,47.16 U2.2 8.73,47.3 8.73,61.91 6.65,63.99 6.65,89.4 5.75,90.3 5.61,90.37 | 5.61,90.37 5.05,90.37 J4.P4 | 5.61,90.37 6.37,91.13 6.37,100.76 6.99,101.38 C9.1 7.13,101.52 8.86,101.52 R10.2 9.07,101.45 21.74,101.45 27.29,106.99 R_BOOT.1 27.42,107.13 43.7,107.13 | 43.7,107.13 44.18,107.61 R_RESET.1 | 43.7,107.13 43.77,106.99 43.77,106.09 47.51,102.35 47.71,102.35 IC1.2 47.85,102.42 48.13,102.42 49.58,103.88 51.31,103.88 54.98,107.55 R_CHANGE.1 58.93,107.48 66.55,99.86 81.51,99.86 TP16.TP 81.65,99.72 81.65,67.86 86.63,62.88 D7.2 86.77,62.74 86.91,62.74 88.36,61.29 R1_PINH1.2 88.29,61.15 88.29,59.83 87.67,59.21 U3.2 87.53,59.07 87.53,57.2 | 127.7,34.69 126.59,33.59 125.55,33.59 120.22,38.92 120.22,45.01 119.32,45.91 C1_BAT2.1 119.18,45.84 89.54,45.84 89.4,45.7 88.43,45.7 87.74,46.4 R2-PINH1.2 | 127.7,45.15 127.7,34.69 | 127.7,45.15 126.94,45.91 IC4.5 | J3.2 164.33,18.97 143.49,18.97 127.83,34.62 127.7,34.69 | C3.+ 130.26,45.29 127.77,45.29 127.7,45.15 | U1.3 34.21,55.54 36.08,57.41 36.08,58.24 36.29,58.45 41.41,58.45 41.97,57.89 U1.8 42.03,57.76 42.03,57.2 | 42.03,57.2 42.03,56.65 U1.7 | Q2.3 81.37,24.52 80.88,25 80.88,39.75 87.6,46.47 R2-PINH1.2 | 87.53,57.2 87.53,52.7 85.73,50.9 85.73,48.41 87.53,46.6 R2-PINH1.2 | 87.53,57.2 42.03,57.2
32KHZ  (via drill 0.3)
  Top 0.15: v89,47.88 89,46.5 R2-PINH1.1 | v89,57.75 89,59.12 U3.1 | v21.12,48.38 17.75,48.38 17.75,47.25 U2.9 | v86.12,47.25 v56.12,47.25
  Bottom 0.15: v89,57.75 v89,47.88 89,47.25 v86.12,47.25 | v21.12,48.38 22.5,47 56.12,47 v56.12,47.25
DN  (via drill 0.3)
  Top 0.15: v164.25,53.62 163.25,53.62 J2.B7 | v164.25,54.62 163.25,54.62 J2.A7 | v161.75,52.88 161.62,52.88 160.88,52.12 153.62,52.12 D1.4
  Bottom 0.15: v164.25,54.62 v164.25,53.62 163.62,53 163.62,52.88 v161.75,52.88
DP  (via drill 0.3)
  Top 0.15: v164.88,53.62 164.38,54.12 163.25,54.12 J2.A6 | v155.25,52.62 153.88,54 153.62,54 D1.6 | v164.62,55.12 163.25,55.12 J2.B6
  Bottom 0.15: v164.88,53.62 164.75,53.5 164.75,52.88 163.88,52 155.25,52 v155.25,52.62 150.88,52.62 149.5,54 149.5,55.12 v164.62,55.12
EPD_3V3
  Top 0.3: 79.26,19.91 79.57,20.22 79.57,22.92 Q2.2 | 79.26,19.91 71.19,11.84 69.94,11.84 EPD_C5.1 | 79.26,19.91 80.47,18.7 82.06,18.7 85.59,15.17 85.59,14.89 J1.16 85.66,14.75 86.08,14.75 J1.15 86.15,14.89 86.15,15.17 87.81,16.83 110.45,16.83 111.22,17.59 111.22,19.46 109.97,20.71 TP17.TP 109.9,20.84 101.52,20.84 94.73,27.63 86.42,27.63 86.28,27.7 | 86.28,27.7 82.89,24.31 82.89,23.27 C7.1 | 86.28,27.7 L1.2
EPD_3V3_C
  Top 0.3: TP13.TP 109.9,18.14 103.6,18.14 100.41,21.33 82.89,21.33 79.29,24.93 Q2.1 79.22,25.07 79.01,24.86 77.84,24.86 R_CL1.2 77.7,24.93 51.59,51.04 33.52,51.04 20.29,64.26 20.29,64.68 U2.18
EPD_BUSY  (via drill 0.3)
  Top 0.15: v89.25,15.5 89.12,15.5 89.12,14.75 J1.9 | 109,10.38 v108.62,10.75 | 109,10.38 109.88,10.38 TP9.TP 109,10.38 | v20.25,53.38 20.25,53.5 10.25,63.5 10.12,63.5 10.12,64.62 U2.26 | v28.12,48.88 65.5,11.5 65.5,10.12 77.88,10.12 78.12,10.38 109,10.38
  Bottom 0.15: v89.25,15.5 91.5,13.25 91.5,11.25 92,10.75 v108.62,10.75 | v20.25,53.38 24.75,48.88 v28.12,48.88
EPD_CS  (via drill 0.3)
  Top 0.15: v87,13.88 87.5,13.88 87.5,14.62 J1.12 | 78.5,20.75 v78.5,19.88 | 78.5,20.75 78.75,20.75 D6.2 78.5,20.75 | 78.5,20.75 78.5,24 78.38,24.12 76.88,24.12 76.25,24.75 R9.1 | v23.12,46 20.25,46 20.25,47.12 U2.11 | v88.5,10.88 108.12,10.88 110,12.75 TP10.TP
  Bottom 0.15: 86.25,13.12 86.12,13 81.75,13 | 86.25,13.12 v87,13.88 | 81.75,13 81,13 81,13.75 78.5,16.25 v78.5,19.88 | v23.12,46 57.38,11.75 81.75,11.75 81.75,13 | 86.25,13.12 v88.5,10.88
EPD_DC  (via drill 0.3)
  Top 0.15: v88.12,15.88 88.12,14.75 J1.11 | v108.88,22.5 109.88,23.5 TP11.TP | v18.5,46 12.62,46 12.62,47.12 U2.5
  Bottom 0.15: 94.75,22.5 v88.12,15.88 | v108.88,22.5 94.75,22.5 | v18.5,46 22.62,46 22.62,46.12 23.12,46.62 56.62,46.62 56.62,52.25 57,52.62 84.62,52.62 84.62,32.62 94.75,22.5
EPD_RST  (via drill 0.3)
  Top 0.15: v89,13.88 88.62,13.88 88.62,14.62 J1.10 | v90.25,13.88 90.88,13.25 107.75,13.25 109.88,15.38 TP12.TP | v14.5,65.88 16.38,65.88 16.38,64.75 U2.21
  Bottom 0.15: v90.25,13.88 v89,13.88 89,10.38 53.5,10.38 14.62,49.25 14.62,65.75 v14.5,65.88
FLASH_CS  (via drill 0.3)
  Top 0.15: v32.88,48.12 32.75,48.12 32.75,48.75 R5.1 | v34.5,47.88 34.5,48.62 34.25,48.62 D9.2 | v34.25,57.25 34.25,57.75 U1.1 | v23,48.38 21.62,48.38 21.62,47.25 U2.12
  Bottom 0.15: 34.25,48.12 34.5,48.12 v34.5,47.88 | 34.25,48.12 v32.88,48.12 32.88,48.38 v23,48.38 | 34.25,48.12 v34.25,57.25
GDR  (via drill 0.3)
  Top 0.15: v92.62,13.75 92.62,14.62 J1.2 | v81.25,12.25 v92.5,12.25 | v75.5,18 73.5,18 R3.1 73.38,17.88 72.88,17.38 69.75,17.38 68.38,16 Q3.1
  Bottom 0.15: v92.62,13.75 92.5,13.62 v92.5,12.25 | v75.5,18 v81.25,12.25
GND  (via drill 0.3)
  Top 0.3: BOOT_BUTTON.2 25.62,107.62 22.25,107.62 BOOT_BUTTON.1 22.12,107.5 20.25,107.5 20.12,107.38 C6.2 20,107.25 14.88,102.12 v7.88,102.12 6.5,102.12 2.38,98 2.38,95.5 J4.G4 2.38,95.38 2.38,94.12 | 2.38,94.12 3.88,92.62 4.88,92.62 J4.P6 | 2.38,94.12 1.38,94.12 1.38,82.25 J4.G3 | U2.29_1 12,53.25 12,54.38 U2.29_2 | U2.29_4 13.25,53.25 12.12,53.25 U2.29_1 | U2.29_5 13.25,54.38 13.25,53.38 U2.29_4 | U2.29_4 13.38,53.25 14.5,53.25 U2.29_7 14.5,53.38 14.5,54.38 U2.29_8 14.5,54.5 14.5,55.62 U2.29_9 14.5,55.75 13.38,55.75 U2.29_6 13.25,55.75 12.12,55.75 U2.29_3 12.12,55.88 12.12,59.12 7.62,63.62 7.62,64.62 U2.28 7.62,64.75 7.62,85.25 J4.G1 15.62,85.25 17.25,86.88 17.25,90.88 | v7.62,50.25 7.62,47.25 U2.1 | v9.62,52.25 10.5,53.12 11.88,53.12 U2.29_1 | 11,99.5 12.5,99.5 13.25,98.75 D8.1 | 11,99.5 7.75,99.5 7.12,100.12 C9.2 7.25,100.12 v7.88,100.75 | C5.2 53.62,107.5 50.75,107.5 RESET_BUTTON.2 | RESET_BUTTON.1 47.25,107.62 50.62,107.62 RESET_BUTTON.2 | 51.12,102 52.12,102 C_DELAY.2 | 51.12,102 50,102 49.62,101.62 48.12,101.62 47.88,101.38 IC1.3 47.62,101.38 37.12,90.88 17.25,90.88 | 17.25,90.88 15.62,90.88 J4.G2 15.5,91 11,91 11,99.5 | v51.12,104.5 51.12,107.38 RESET_BUTTON.2 | v51.12,102.12 51.12,102 | v59.62,107.5 62.12,107.5 CHANGE_BUTTON.1 62.25,107.62 65.62,107.62 CHANGE_BUTTON.2 65.75,107.5 68.38,107.5 C10.2 68.62,107.5 80,107.5 87.88,99.62 TP4.TP 88,99.5 91.75,95.75 91.75,60.62 92,60.62 C8.2 93.88,58.62 93.88,55.38 | D3.2 91.75,25.12 91.38,24.75 85.75,24.75 84.25,23.25 C7.2 84.12,23.12 v84.12,21.88 | EPD_C1.2 93.88,20.62 92.25,20.62 EPD_C2.2 92.12,20.62 90.38,20.62 EPD_C12.2 90.25,20.62 88.5,20.62 EPD_C6.2 88.38,20.62 86.62,20.62 EPD_C8.2 86.5,20.62 84.88,20.62 EPD_C7.2 84.75,20.62 84,20.62
  Top 0.3: 84,20.62 83,20.62 EPD_C10.2 82.88,20.62 81.25,20.62 EPD_C11.2 81,20.62 v80.12,20.62 | v84,20.75 84,20.62 | 84.12,13.25 80.62,13.25 80.62,12.25 J1.MP2 80.5,12.12 79.5,11.12 69.38,11.12 69.12,11.38 69.12,13 69.88,13 EPD_C5.2 70,13.25 71.19,14.44 | 84.12,13.25 85.12,14.25 85.12,14.62 J1.17 | 89.62,13.25 89.62,14.62 J1.8 | 84.12,13.25 89.62,13.25 | 89.62,13.25 89.75,13.25 90.12,12.88 93.38,12.88 94,12.25 J1.MP1 94.25,12.25 94.88,12.88 108.25,12.88 109.5,14.12 110.5,14.12 119.62,23.25 v119.62,43.88 119.62,44.62 119.38,44.62 C1_BAT2.2 | 76.12,20.75 77.25,20.75 D6.1 77.12,20.62 v77.88,19.88 | 76.12,20.75 74.88,20.75 73.5,19.38 R3.2 | SJ1.1 66.75,11.62 67,11.62 R2.1 68,14.5 71.12,14.5 71.19,14.44 | 71.19,14.44 71.88,15.12 71.88,15.62 EPD_C9.2 71.88,15.75 72.88,16.75 75,16.75 75.75,17.5 76.12,17.5 76.12,20.75 | C1.2 C2.2 | 157.5,10.75 158.5,10.75 158.88,10.38 158.88,10 SENSOR2.5 158.88,9.88 158.88,9.5 158.5,9.12 158.38,9.12 158.38,7.12 C1.2 | 157.5,10.75 157.38,10.75 157.38,10 SENSOR2.7 | SENSOR2.1 156.62,12.88 156.62,11.5 156.88,11.5 157.5,10.88 157.5,10.75 | 160.38,6.38 160.38,5.25 160.12,5 154.75,5 154.75,13.75 158,17 163.5,17 164.38,17.88 J3.1 | 160.38,6.38 158.88,6.38 158.38,6.88 C1.2 | J2.B12 163.25,51.25 163.25,51 J2.A1 163.25,50.88 163.25,49.25 163.75,49.25 J2.MP3 | 165.75,49.25 163.88,49.25 J2.MP3 | 165.75,49.25 167.62,49.25 J2.MP1 | v120.75,42.75 121.12,42.75 121.12,42 R1_PWRUSB.1 | v122.75,44.62 123.75,44.62 124,44.88 IC4.2 | 131.44,43.19 130.62,42.38 130.38,42.38 C3.- 130.38,42.5 v128.25,44.62 | 131.44,43.19 133.25,45 C1_BAT1.2 | 134.38,43.12 134.38,46.75 134.12,47 130.38,47 128.25,49.12 C2_BAT.2
  Top 0.3: 134.38,43.12 131.5,43.12 131.44,43.19 | J2.MP3 163.12,49.25 156.25,42.38 135.25,42.38 134.5,43.12 134.38,43.12 | 165.75,49.25 165.75,11.88 160.38,6.5 160.38,6.38 | D9.1 34.25,50.25 34.5,50.5 v42.25,50.5 42.62,50.5 52.38,40.75 D10.1 52.5,40.75 55,40.75 D12.1 55.12,40.75 56.88,40.75 D11.1 | U1.4 34.25,54.12 36,55.88 38,55.88 U1.9 38.12,55.88 42.31,51.69 | 42.31,51.69 42.5,51.5 85,51.5 85,49.88 U3.13 85.12,49.75 v85.12,47.75 | v42.25,51.62 42.31,51.69 | 93.88,55.38 93.88,51.88 C10_SUPERCAP.1 93.88,51.75 v92.88,50.75 | 134.62,56.88 134.25,57.25 124.62,57.25 122.88,55.5 R2_BAT.1 122.75,55.38 93.88,55.38 | 134.62,56.88 134.62,55 133.62,55 C1_BAT.2 | U4.1 136.75,56.25 137.12,56.25 137.75,55.62 U4.9 137.75,55.5 138,55.25 138.12,55.25 138.19,55.19 | 136.75,54.75 137.75,54.75 138.19,55.19 | 138.19,55.19 138.25,55.25 138.62,55.25 U4.6 | 136.75,54.75 U4.4 | 136.75,53 135.12,51.38 134,51.38 132.38,53 131.38,53 131,53.38 MCP73831.2 | 136.75,54.75 136.75,53 | C5_USB.2 152.12,48.38 152.12,49.88 C4_USB.2 152,50 152,52.75 | 150.88,52.88 149.25,52.88 149,52.62 R2-USB1.1 148.75,52.62 137.25,52.62 136.88,53 136.75,53 | 150.88,52.88 151,53 D1.2 | 152,52.75 150.88,52.75 150.88,52.88 | 163.12,57.75 159.62,57.75 | 159.62,57.75 156.5,57.75 R2-USB.2 156.38,57.75 152,57.75 152,52.75 | 163.12,57.75 J2.A12 163.25,57.62 163.25,57.38 J2.B1 | 159.62,57.75 159.62,65 TP5.TP 159.5,65.25 158.25,66.5 144.38,66.5 134.75,56.88 134.62,56.88 | 163.12,57.75 163.12,57.88 163.75,57.88 163.75,59.38 J2.MP4 163.88,59.38 167.62,59.38 J2.MP2
  Bottom 0.3: v9.62,52.25 v7.62,50.25 | v51.12,102.12 v51.12,104.5 51.12,107.5 v59.62,107.5 | v7.88,100.75 v7.88,102.12 | v84.12,21.88 84,21.75 v84,20.75 | v80.12,20.62 77.88,20.62 v77.88,19.88 | v128.25,44.62 v122.75,44.62 120.88,42.75 v120.75,42.75 v119.62,43.88 92.88,43.88 92.88,46.62 | v42.25,51.62 v42.25,50.5 | v85.12,47.75 85.5,47.38 85.5,47.12 86,46.62 92.88,46.62 | v92.88,50.75 92.88,46.62
  pour Top: -12.82,114.98 -12.84,114.96 -13.22,114.57 -13.22,0.13 -8.47,-4.62 172.77,-4.62 176.92,-0.47 176.92,114.07 175.97,115.02 -12.82,115.02
  pour Bottom: -15.67,-16.72 185.22,-16.72 183.14,-14.64 183.12,-14.62 183.12,119.57 181.47,121.22 -17.09,121.22 -23.52,119.94 -23.52,-8.87
GPIO8
  Top 0.15: R1.1 19,44.25 19,47.12 U2.10
I2C_PW  (via drill 0.3)
  Top 0.15: 157.12,5.75 158.25,5.75 C1.1 158.38,5.75 159.5,5.75 R1_PINH.2 | 157.12,5.75 155.88,7 R2_PINH.2 155.88,7.12 156.38,7.62 156.5,7.62 156.5,9.25 | 157.12,5.75 C2.1 | 156.5,9.25 156.5,9.88 SENSOR2.8 156.62,10 156.75,10 v156.75,10.88 | v157.25,11.88 157.25,12.88 SENSOR2.2 | 156.5,9.25 157.75,9.25 157.88,9.38 158.12,9.38 158.12,9.88 SENSOR2.6 | v85.88,62.88 85.25,63.5 21.62,63.5 21.62,64.62 U2.17
  Bottom 0.15: v156.75,10.88 156.75,11.38 v157.25,11.88 141.5,27.62 141.5,53.75 134,53.75 124.88,62.88 v85.88,62.88
INT_RTC  (via drill 0.3)
  Top 0.15: 87,60.88 87,59.25 86.38,59.25 U3.3 | 87,60.88 87,61.12 R1_PINH1.1 87,60.88 | v28.62,50.62 16.5,50.62 16.5,47.25 U2.8 | v33.75,58.5 36.12,60.88 84.25,60.88 | 87,60.88 84.25,60.88 | v84.62,65.62 84.62,99.75 TP15.TP | 84.25,60.88 v84.25,61.75
  Bottom 0.15: v28.62,50.62 33.75,55.75 v33.75,58.5 | v84.62,65.62 84.25,65.25 v84.25,61.75
IO/BOOT  (via drill 0.3)
  Top 0.15: C6.1 20.12,108.75 20.38,109 22.12,109 BOOT_BUTTON.4 22.25,109 22.88,108.38 v24.62,108.38 25.25,109 25.62,109 BOOT_BUTTON.3 25.75,109 26.75,109 27.38,108.38 R_BOOT.2 | v24.88,65.38 24.75,65.38 24.12,64.75 U2.15
  Bottom 0.15: v24.88,65.38 24.62,65.62 v24.62,108.38
IO/CHANGE  (via drill 0.3)
  Top 0.15: C10.1 68.38,108.88 68.25,109 65.75,109 CHANGE_BUTTON.3 65.62,109.12 62.25,109.12 CHANGE_BUTTON.4 62.12,109 v60.12,109 59,109 58.88,108.88 R_CHANGE.2 | v32.5,69.38 14,69.38 14,64.75 U2.23
  Bottom 0.15: v32.5,69.38 60.12,97 v60.12,109
MISO  (via drill 0.3)
  Top 0.15: R8.1 55.25,37.5 55.25,39.12 55.12,39.12 D12.2 55,39.25 54.25,40 46.75,40 v36.88,49.88 | v27.75,57.62 33.12,57.62 34.12,56.62 U1.2 | v15.5,57.62 8.88,64.25 8.88,64.62 U2.27 | v4,93.25 4.75,93.25 5.12,93.62 J4.P7 | v24.12,88.12 30.38,88.12 31,88.75 TP6.TP
  Bottom 0.15: v4,93.25 5.62,91.62 5.62,85.62 13.62,77.62 | 13.62,77.62 15.5,75.75 v15.5,57.62 v27.75,57.62 27.75,59 33.88,59 34.75,58.12 34.75,52 v36.88,49.88 | 13.62,77.62 v24.12,88.12
MOSI  (via drill 0.3)
  Top 0.15: v15.12,51.75 15.12,47.25 U2.7 | 23.88,78.75 31,85.88 TP7.TP | 23.88,78.75 v15,69.88 | v4.38,88.5 5.12,89.25 J4.P3 | R7.1 56.62,37.5 56.62,39.12 56.88,39.12 D11.2 56.88,39.25 v56.12,40 | v86.38,13.88 86.5,13.88 86.5,14.62 J1.14 | v63.62,52.12 60,55.75 41.38,55.75 | 41.38,55.75 41.25,55.62 41.25,54.12 41.88,54.12 U1.5 42,54 43.75,52.25 57,52.25 v57.12,52.12 | v35.75,66.88 23.88,78.75 | 41.38,55.75 v41.25,55.88
  Bottom 0.15: v15.12,51.75 15,51.88 v15,69.88 5.25,79.62 5.25,87.62 v4.38,88.5 | v86.38,13.88 87.75,15.25 87.75,15.62 87.5,15.88 87.5,28.25 v63.62,52.12 | v56.12,40 57.5,41.38 57.5,51.75 v57.12,52.12 | v35.75,66.88 41.25,61.38 v41.25,55.88
N$1  (via drill 0.3)
  Top 0.15: v161.75,56.5 156.5,56.5 R2-USB.1 | v164.25,56.38 164,56.12 163.25,56.12 J2.B5
  Bottom 0.15: v161.75,56.5 164.25,56.5 v164.25,56.38
N$2  (via drill 0.3)
  Top 0.15: v83,17 81.62,17 81.62,14.75 J1.24 | v84,19.75 84.12,19.88 89.75,19.88 90.25,19.38 EPD_C12.1
  Bottom 0.15: v83,17 83,18.75 v84,19.75
N$3  (via drill 0.3)
  Top 0.15: R2-USB1.2 149.12,54.12 v150,54.12 | v164.25,53 163.25,53 J2.A5
  Bottom 0.15: v150,54.12 161.25,54.12 161.25,52.75 161.62,52.38 163.75,52.38 163.75,52.5 v164.25,53
N$4  (via drill 0.3)
  Top 0.15: 124.62,46.5 124.12,46 IC4.1 124.12,45.88 124.88,45.88 124.88,44.62 124.62,44.38 124.38,44.38 124.12,44.12 IC4.3 | 124.62,46.5 124.75,46.62 134,46.62 134,44.5 133.38,43.88 C1_BAT1.1 | v122.88,46.62 121.25,46.62 121,46.38 D2.1 | 124.62,46.5 v124.5,46.62 | v134.38,50 135.5,50 Q1.2
  Bottom 0.15: v122.88,46.62 v124.5,46.62 131,46.62 v134.38,50
N$5  (via drill 0.3)
  Top 0.15: v126.75,51.62 126,51.62 125.25,52.38 R1_BAT.1 | v130.12,51.62 130.88,52.38 MCP73831.1
  Bottom 0.15: v130.12,51.62 v126.75,51.62
N$6
  Top 0.15: CHG_LED.C 125.25,54.25 126.38,53.12 126.38,52.5 R1_BAT.2
N$7  (via drill 0.3)
  Top 0.15: C4.1 96.12,28.88 95.38,28.88 D4.2 95.25,28.75 v95.25,28 | v95.25,26.38 95.25,25.25 D3.1
  Bottom 0.15: v95.25,28 v95.25,26.38
N$8  (via drill 0.3)
  Top 0.15: v84.5,15.5 84.5,14.75 J1.18 | v86.62,17.62 88.25,19.25 88.38,19.25 EPD_C6.1
  Bottom 0.15: v86.62,17.62 v84.5,15.5
N$9
  Top 0.15: R2_BAT.2 122.88,54.25 125.5,56.88 134.12,56.88 134.25,56.75 134.25,55.5 130.88,55.5 128.38,53 128.38,52.5 MCP73831.5
N$10  (via drill 0.3)
  Top 0.15: v91.62,15.88 91.62,14.75 J1.4 | v93.25,18.62 93.88,19.25 EPD_C1.1
  Bottom 0.15: v91.62,15.88 93.25,17.5 v93.25,18.62
N$11  (via drill 0.3)
  Top 0.15: v91.12,16.25 91.12,14.75 J1.5 | v91.5,18.62 92.12,19.25 EPD_C2.1
  Bottom 0.15: v91.12,16.25 91.5,16.62 v91.5,18.62
N$12
  Top 0.15: IC1.5 50.62,103.25 52.12,103.25 C_DELAY.1
N$13  (via drill 0.3)
  Top 0.15: v84,16 84,14.75 J1.19 | v84,19.12 84.12,19.25 84.75,19.25 EPD_C7.1
  Bottom 0.15: v84,19.12 v84,16
N$14  (via drill 0.3)
  Top 0.15: v83.5,16.5 83.5,14.75 J1.20 | v83.5,18 84.25,18.75 86,18.75 86.5,19.25 EPD_C8.1
  Bottom 0.15: v83.5,18 v83.5,16.5
N$15  (via drill 0.3)
  Top 0.15: v82.5,15.75 82.5,14.75 J1.22 | v82.12,19.38 82.88,19.38 EPD_C10.1
  Bottom 0.15: v82.5,15.75 82.12,16.12 v82.12,19.38
N$16
  Top 0.15: R_CAPACITOR.2 91.5,51 91.5,58.62 91,58.62 89,60.62 89,62.75 88.88,62.75 D7.1
PREVGH  (via drill 0.3)
  Top 0.15: v83,16.12 83,14.75 J1.21 | v83.12,31.5 82.25,32.38 D5.2 | v73.88,16.12 73.62,16.12 73.25,15.75 EPD_C9.1
  Bottom 0.15: v83,16.12 82.5,16.62 82.5,19.12 83.12,19.75 83.12,29.5 | v83.12,31.5 83.12,29.5 | v73.88,16.12 74.5,16.75 74.5,20.88 83.12,29.5
PREVGL  (via drill 0.3)
  Top 0.15: v82,13.88 82,14.62 J1.23 | v81.88,20 81.25,19.38 EPD_C11.1 | v82.62,27.38 83.5,27.38 83.5,29.5 84.62,30.62 90,30.62 91.75,28.88 D4.1
  Bottom 0.15: v82,13.88 81.62,14.25 81.62,19.75 v81.88,20 81.88,26.62 v82.62,27.38
RESE  (via drill 0.3)
  Top 0.15: v92,13.75 92,14.62 J1.3 | v92,11.75 91.62,11.38 80.25,11.38 79.62,10.75 69.12,10.75 68.88,10.5 66,10.5 65.88,10.62 65.88,15.25 67.75,15.25 | 67.75,15.25 68.75,15.25 69.5,16 Q3.2 | 67.75,15.25 67.75,18 68.75,19 71.88,19 72.12,19.25 R4.1
  Bottom 0.15: v92,11.75 v92,13.75
RESE'  (via drill 0.3)
  Top 0.15: SJ1.2 68.25,11.62 68.25,13.5 R2.2 68.38,13.62 68.88,13.62 v69.12,13.88 | v70.88,17.88 72.12,17.88 R4.2
  Bottom 0.15: v70.88,17.88 69.12,16.12 v69.12,13.88
RESET  (via drill 0.3)
  Top 0.15: C5.1 53.62,108.88 53.5,109 50.75,109 RESET_BUTTON.3 50.62,109.12 47.25,109.12 RESET_BUTTON.4 47.12,109 46.5,108.38 44.75,108.38 | 44.75,108.38 44.25,108.88 R_RESET.2 | 44.75,108.38 46.38,106.75 47.75,106.75 v47.75,104 47.75,103.25 IC1.1 | v25.62,58.12 19.75,52.25 10.12,52.25 10.12,47.25 U2.3
  Bottom 0.15: v25.62,58.12 32,64.5 32,88.25 v47.75,104
RTC_RST  (via drill 0.3)
  Top 0.15: v76.38,65.88 22.88,65.88 22.88,64.75 U2.16 | v81.88,60.38 82,60.5 84.12,60.5 85,59.62 85,59.25 U3.4
  Bottom 0.15: v81.88,60.38 v76.38,65.88
RX
  Top 0.15: U2.24 12.62,64.75 12.62,71 13.88,71 TP2.TP
SCK  (via drill 0.3)
  Top 0.15: v87.25,15.5 87.12,15.5 87.12,14.75 J1.13 | v61.62,36.75 53.12,36.75 52.5,37.38 R6.1 | v57.75,52.12 57.25,52.62 44.62,52.62 42,55.25 U1.6 | D10.2 52.5,39.12 52.5,37.5 R6.1 | v14.62,48.38 14,48.38 14,47.25 U2.6 | v33.62,29.38 43.88,29.38 TP8.TP 44,29.38 v45,30.38 | v4,91 4.75,91 5.12,91.38 J4.P5 | R6.1 51.88,36.88 v51.5,36.88
  Bottom 0.15: v87.25,15.5 87.12,15.62 87.12,28.12 78.5,36.75 v61.62,36.75 61.62,48.25 v57.75,52.12 | v33.62,29.38 v14.62,48.38 14.25,48.75 14.25,59.62 3.88,70 3.88,90.88 v4,91 | v45,30.38 v51.5,36.88
SCL  (via drill 0.3)
  Top 0.15: 158.5,13.62 155.12,13.62 155.12,6.38 155.75,5.75 R2_PINH.1 | 158.5,13.62 158.88,13.25 158.88,13 SENSOR2.4 | v140.75,55.62 v139.5,55.62 138.88,55.62 138.75,55.75 U4.7 | v163.75,21.62 164.38,21 J3.4 | v158.5,16.38 158.5,13.62 | v68.38,66.38 17.75,66.38 17.75,64.75 U2.20 | v78.12,56.62 82.12,52.62 v86.5,52.62 | v87.88,51.25 88.88,50.25 88.88,49.88 U3.16
  Bottom 0.15: v140.75,55.62 163.75,32.62 v163.75,21.62 v158.5,16.38 | v78.12,56.62 v68.38,66.38 | v86.5,52.62 v87.88,51.25 88.5,51.88 88.5,57.38 85.38,60.5 85.38,63.38 124.88,63.38 132.62,55.62 v139.5,55.62
SDA  (via drill 0.3)
  Top 0.15: 159.5,12.12 159.5,7.12 R1_PINH.1 | 159.5,12.12 158.62,12.12 158.25,12.5 158.25,12.88 SENSOR2.3 | v139.5,56.25 138.75,56.25 U4.8 | v162.75,21.25 164,20 164.38,20 J3.3 164.5,19.88 165.38,19.88 165.38,17.62 165.12,17.38 164.75,17.38 159.5,12.12 | v20.25,63.5 19,63.5 19,64.62 U2.19 | v29.88,63 30.88,62 v83.38,62 | v87,51 87,49.88 87.62,49.88 U3.15
  Bottom 0.15: v162.75,21.25 162.75,33 v139.5,56.25 132.5,56.25 125,63.75 85.12,63.75 85.12,63.62 84.75,63.25 84.75,60.62 | v20.25,63.5 29.88,63.5 v29.88,63 | 84.75,60.62 86,59.38 86,52 v87,51 | 84.75,60.62 v83.38,62
SRC  (via drill 0.3)
  Top 0.15: C4.2 96.88,31 95.5,32.38 85.75,32.38 D5.1 85.62,32.38 81.75,28.5 81.75,27.75 L1.1 81.5,27.75 v81.5,27.25 | v75,18.62 69.5,18.62 69,18.12 Q3.3
  Bottom 0.15: v75,18.62 81.5,25.12 v81.5,27.25
SS_SD  (via drill 0.3)
  Top 0.15: D8.2 11.88,98.62 12.62,97.88 14,97.88 14,99.25 13.38,99.88 9.25,99.88 9,100.12 R10.1 8.88,100.12 v8,100.12 | v11.25,51.75 11.25,47.25 U2.4 | v4.12,69.12 4.12,88 5.38,88 5.5,88.12 J4.P2
  Bottom 0.15: v11.25,51.75 6.62,56.38 6.62,66.62 v4.12,69.12 3.5,69.75 3.5,95.62 v8,100.12
TX
  Top 0.15: U2.25 11.38,64.75 TP1.TP
USB_D+  (via drill 0.3)
  Top 0.15: v138.25,53.25 149.38,53.25 149.75,53.62 150.62,53.62 151,54 D1.1 | v85.12,44.75 83.5,46.38 v57,46.38 | v23.75,46 23.75,47.12 24,47.12 U2.14
  Bottom 0.15: v138.25,53.25 127.25,42.25 85.12,42.25 v85.12,44.75 | v57,46.38 56.62,46 v23.75,46
USB_D-  (via drill 0.3)
  Top 0.15: v149.75,52.25 151,52.25 D1.3 | v25.25,47.5 24.5,48.25 23.5,48.25 22.88,47.62 22.88,47.25 U2.13
  Bottom 0.15: v149.75,52.25 135.88,66.12 82.38,66.12 82.38,60.25 75.12,53 37.38,53 37.38,49.75 35,47.38 25.25,47.38 v25.25,47.5
VBAT
  Top 0.3: C2_BAT.1 128.25,50.55 128.25,51.11 129.98,52.84 129.98,53.81 130.47,54.29 130.88,54.29 MCP73831.3 131.02,54.22 133.93,54.22 134.48,53.67 134.62,53.6 | U4.2 136.7,55.75 136.7,55.33 U4.3 136.56,55.26 136.28,55.26 | 134.62,53.6 134.62,52.22 Q1.3 | 136.28,55.26 134.62,53.6 | TP3.TP 156.57,65.09 144.59,65.09 136.01,56.51 136.01,55.61 136.22,55.4 136.28,55.26
VBUS
  Top 0.3: D1.5 153.53,53.05 153.11,53.05 152.63,52.56 152.63,50.76 153.32,50.07 C4_USB.1 153.46,49.93 153.46,48.34 C5_USB.1 153.32,48.2 149.65,44.53 149.37,44.53 PFMP.050.1.2 149.23,44.6 139.05,44.6 133.72,49.93 Q1.1 133.58,50 128.94,50 128.81,49.86 127.63,49.86 127.35,50.14 | 127.35,54.36 128.25,54.36 MCP73831.4 128.39,54.43 130.12,56.16 133.58,56.16 C1_BAT.1 | 127.35,54.36 126.73,54.36 CHG_LED.A | 127.35,54.36 127.35,50.14 | TP14.TP 126.03,34.97 126.03,38.36 122.57,41.83 R1_PWRUSB.2 122.43,41.97 122.43,42.73 120.98,44.18 D2.2 121.19,44.18 127.07,50.07 127.21,50.07 127.35,50.14
VRTC
  Top 0.3: 92.31,49.58 93.97,49.58 C10_SUPERCAP.2 | 92.31,49.58 91.62,49.58 R_CAPACITOR.1 91.41,49.58 90.3,48.48 87.32,48.48 86.42,49.38 86.42,49.79 U3.14 | 92.31,49.58 92.31,51.38 92.03,51.66 92.03,59.14 C8.1
VUSB
  Top 0.3: J2.A4 163.22,51.8 163.22,52.01 J2.B9 163.08,52.08 162.6,52.08 162.32,52.35 | J2.A9 163.22,56.85 J2.B4 163.08,56.51 162.53,56.51 162.32,56.3 162.32,52.35 | 162.32,52.35 162.18,52.28 161.63,52.28 153.87,44.53 PFMP.050.1.1